# Altium PCB Signal Turn D 41mm.PcbDoc
Units mm, origin at the board's own origin, x right, y up, seen from the top; angles counter-clockwise.
Board outline 152.4 x 101.6 mm, 2 copper layers (Top Layer, Bottom Layer); 12 components, 11 nets, 26 pads, 2 vias.
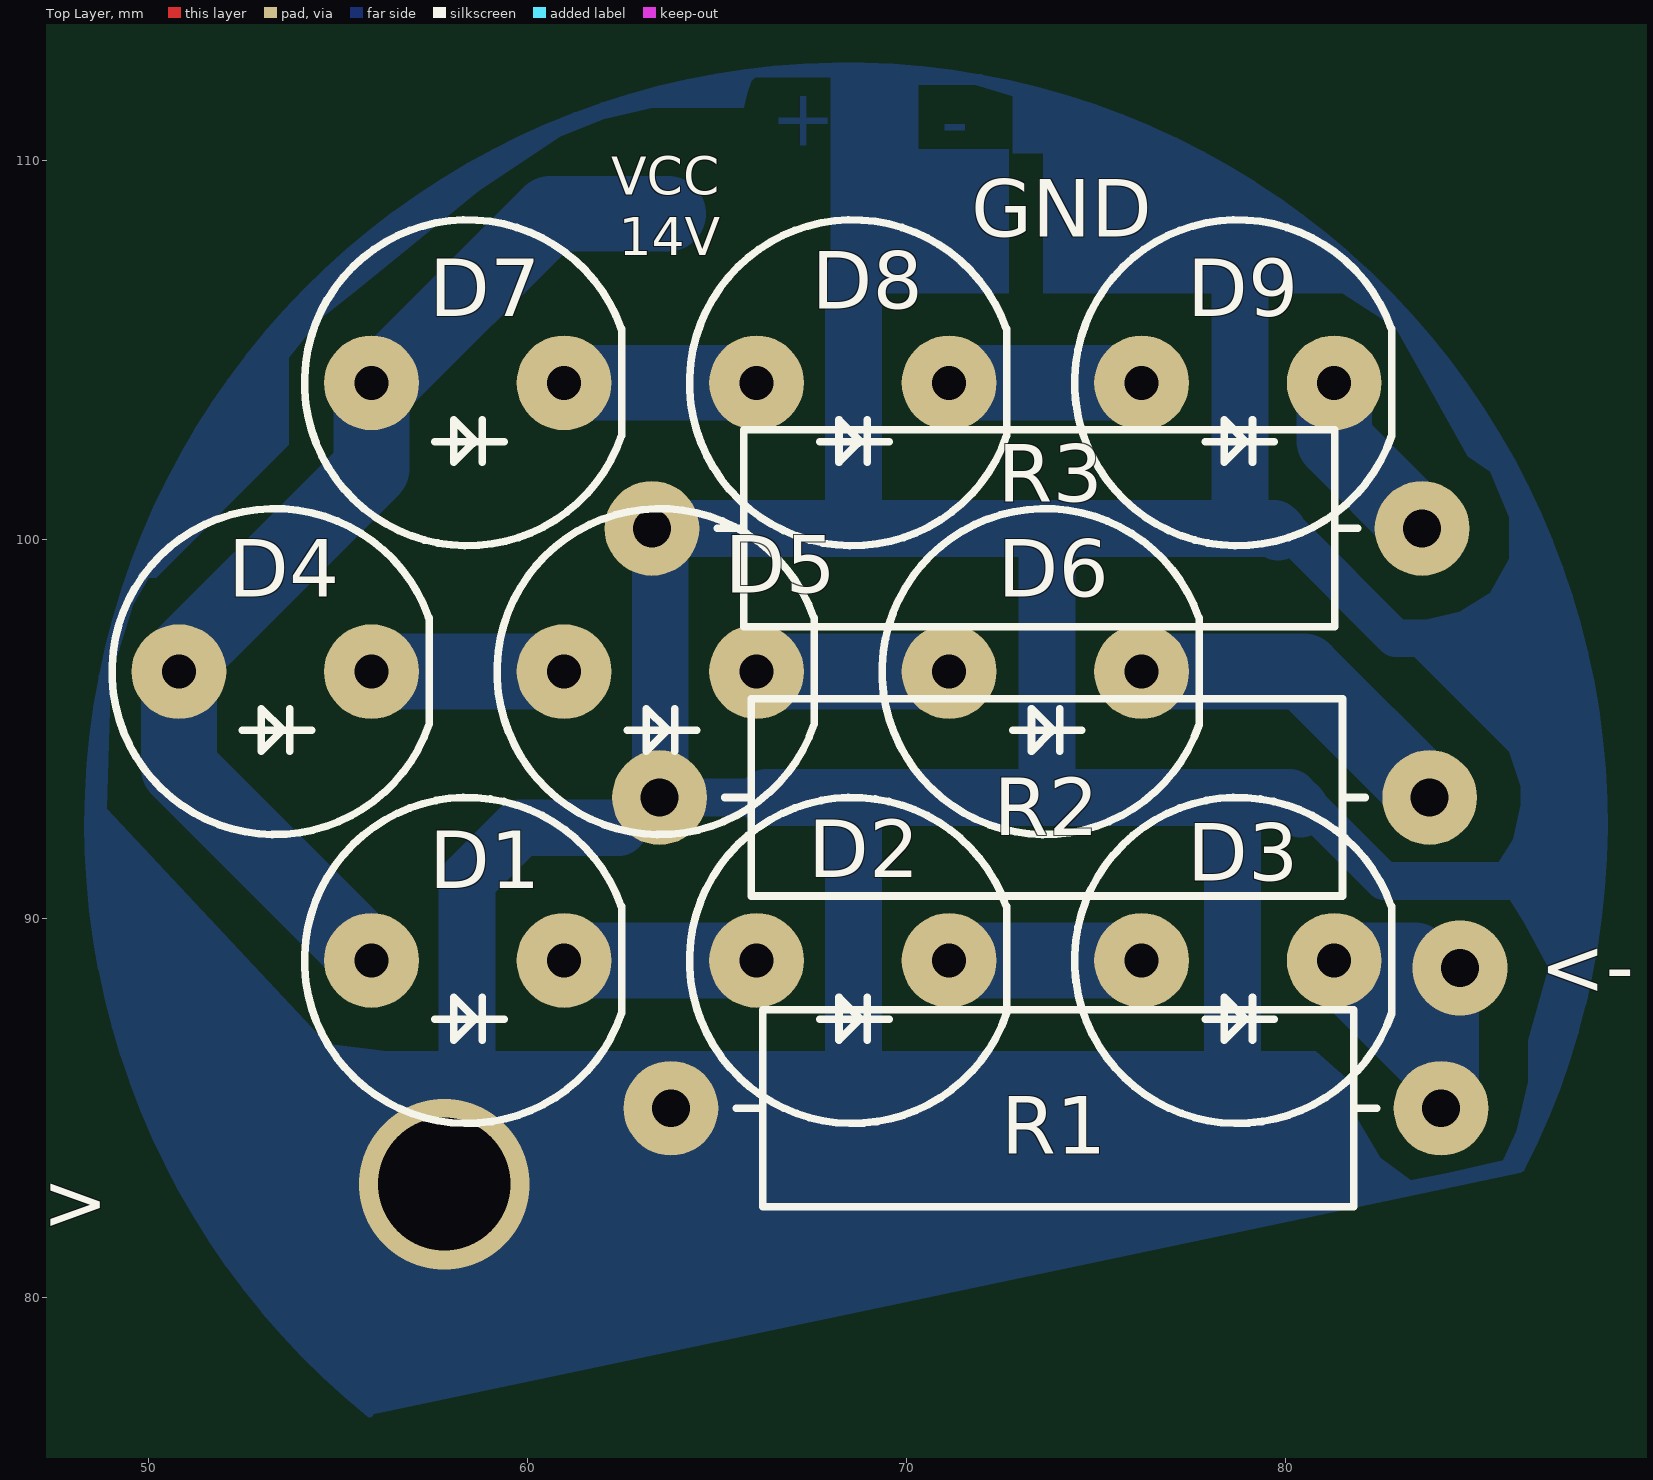
[diagram p0: Top Layer view]
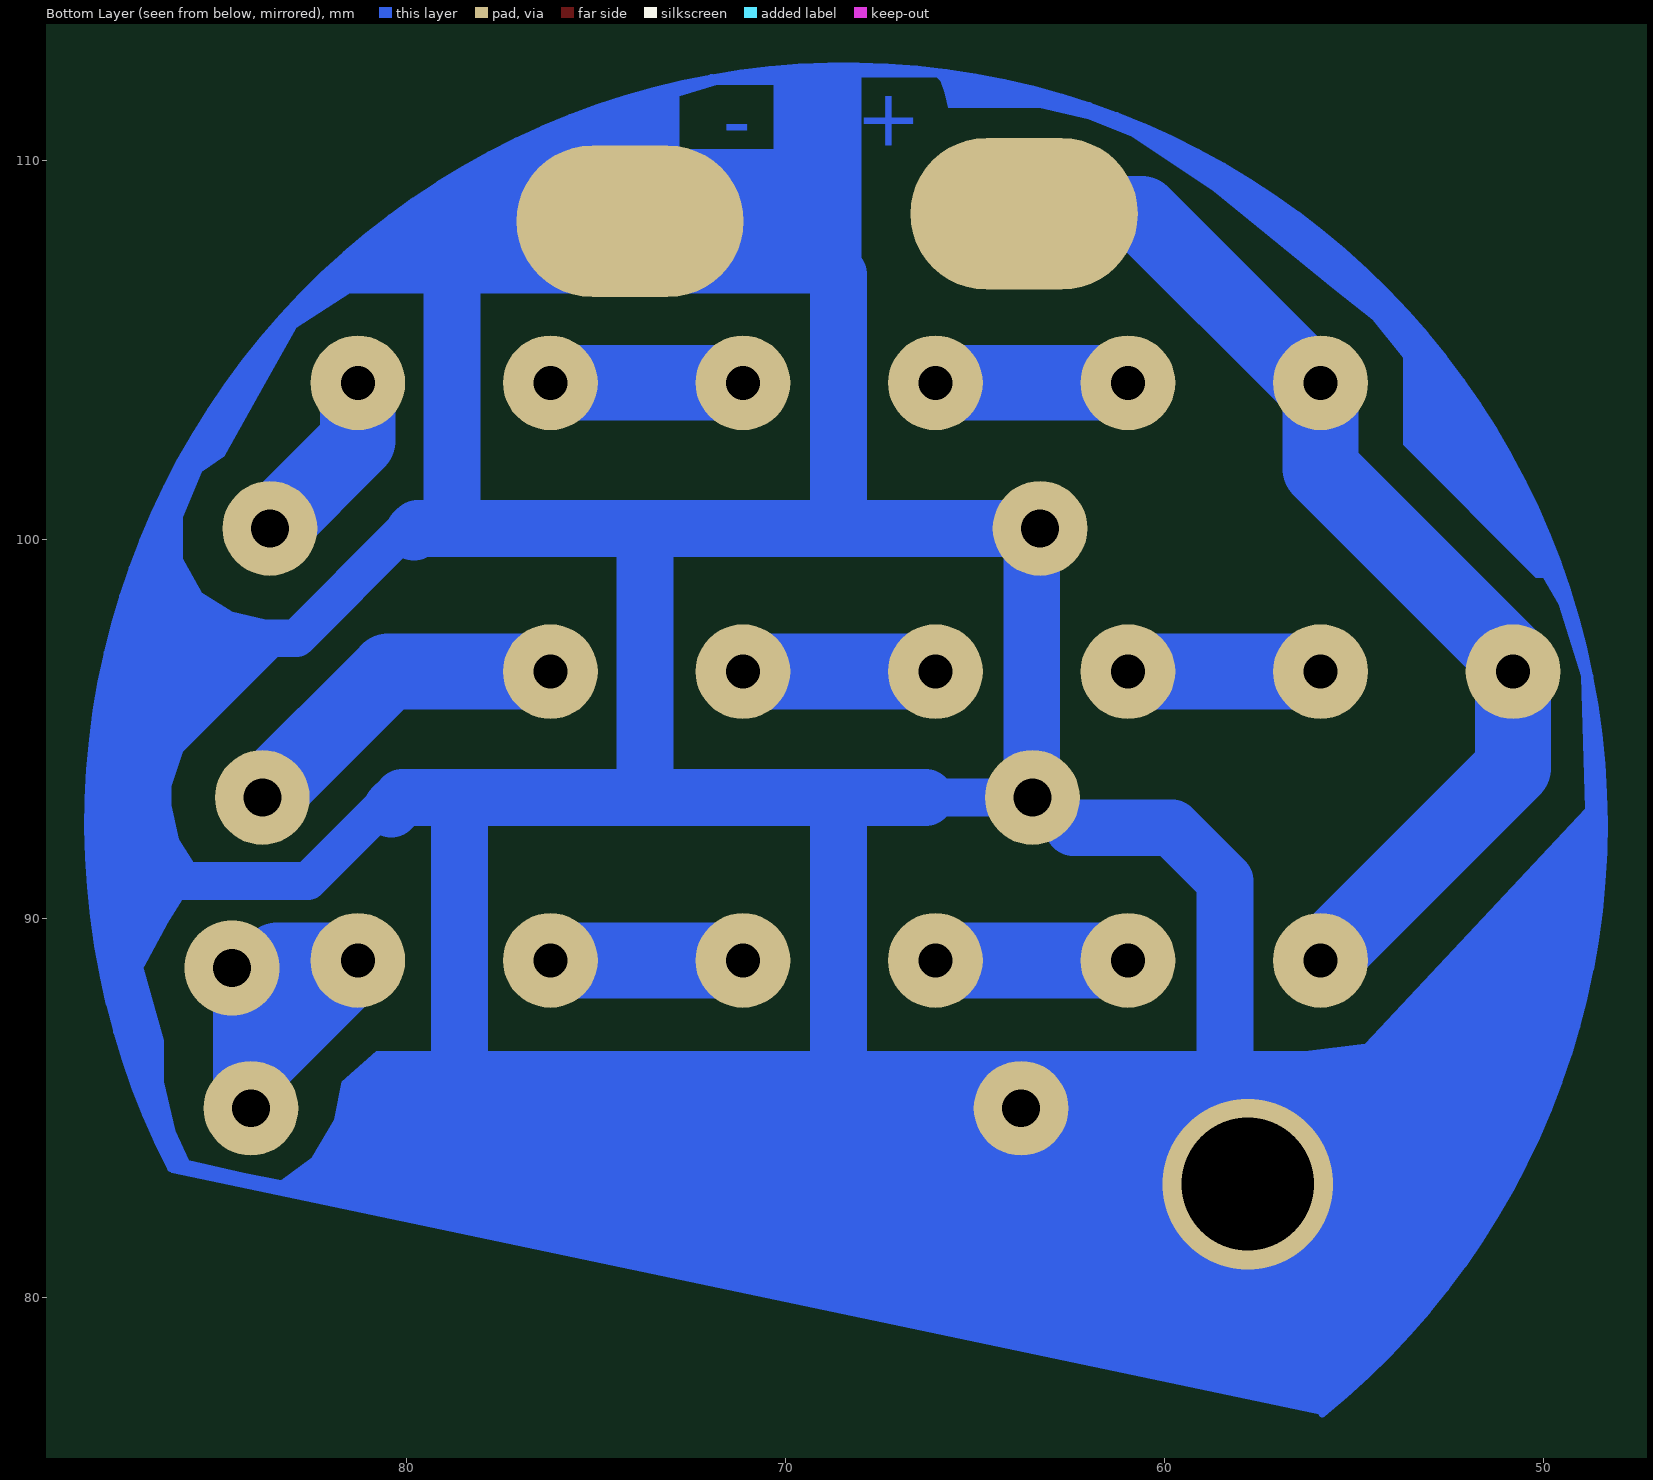
[diagram p1: Bottom Layer view, seen from below]
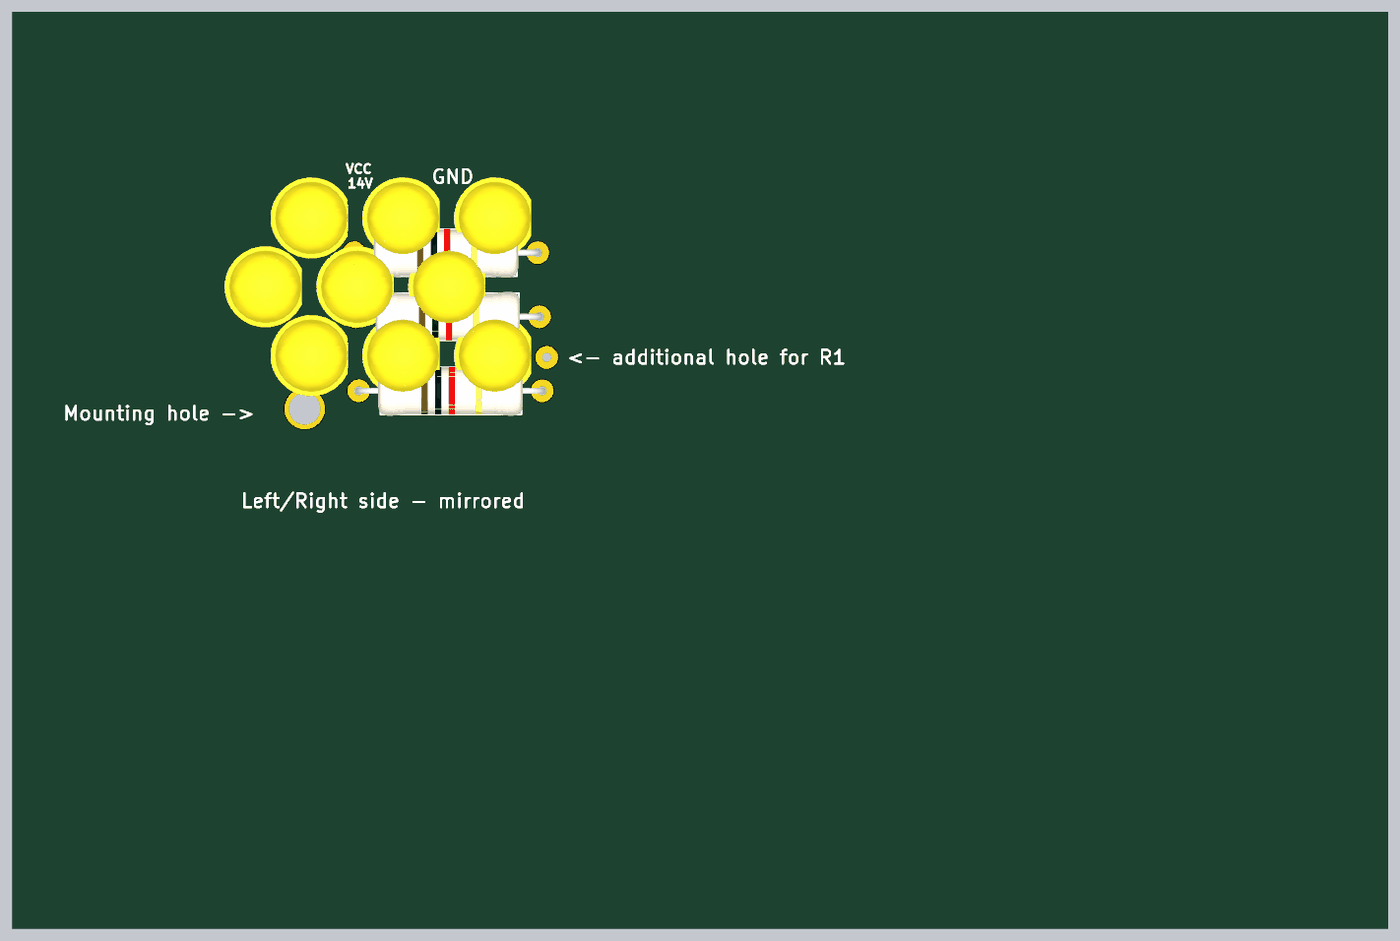
[diagram p2: 3D render of the assembled board from above, using the file's embedded part models]

## Layer stack, top to bottom
Top Solder: solder mask 0.0102, Solder Resist, Dk 3.5
Top Layer: signal copper 0.0356
Dielectric 1: dielectric 0.32, FR-4, Dk 4.8
Bottom Layer: signal copper 0.0356
Bottom Solder: solder mask 0.0102, Solder Resist, Dk 3.5

## Board outline
25.4,25.4 177.8,25.4 177.8,127 25.4,127

## Design rules (kind name [scope] priority, off if disabled: settings)
Clearance [All] p1: gap=0.254
ComponentClearance [All] p1: gap=0 collisioncheckmode=3 verticalgap=0 showdistances=FALSE
HoleSize [All] p1: absolutevalues=TRUE maxlimit=3 minlimit=0.025 maxpercent=80.000 minpercent=20.000
PlaneClearance [All] p1: clearance=1
PlaneConnect [All] p1: planeconnectstyle=Relief reliefexpansion=0.508 reliefentries=4 reliefconductorwidth=0.5 reliefairgap=1
PolygonConnect [All] p1: connectstyle=Relief reliefconductorwidth=0.254 reliefentries=4 polygonreliefangle="90 Angle" airgapwidth=1
RoutingVias [All] p1: holewidth=0.711 width=1.27 viastyle="Through Hole" minholewidth=0.711 minwidth=1.27 maxholewidth=0.711 maxwidth=1.27
SolderMaskExpansion [All] p1: expansion=0.102
Width [All] p1: maxlimit=3 minlimit=0.1 preferedwidth=2
25 further rules are at their usual default settings.

## Components (designator, comment, footprint, x,y, rotation, side; value= is the part's Value field where it differs from the comment)
D1 "Yellow" "LED Round 8mm Yellow" 55.88,88.9 r0 top
D2 "Yellow" "LED Round 8mm Yellow" 66.04,88.9 r0 top
D3 "Yellow" "LED Round 8mm Yellow" 76.2,88.9 r0 top
D4 "Yellow" "LED Round 8mm Yellow" 50.8,96.52 r0 top
D5 "Yellow" "LED Round 8mm Yellow" 60.96,96.52 r0 top
D6 "Yellow" "LED Round 8mm Yellow" 71.12,96.52 r0 top
D7 "Yellow" "LED Round 8mm Yellow" 55.88,104.14 r0 top
D8 "Yellow" "LED Round 8mm Yellow" 66.04,104.14 r0 top
D9 "Yellow" "LED Round 8mm Yellow" 76.2,104.14 r0 top
R1 "Om" "Res p20.32 (9p) 2w" 84.1,85 r180 top
R2 "Om" "Res p20.32 (9p) 2w" 83.8,93.2 r180 top
R3 "Om" "Res p20.32 (9p) 2w" 83.6,100.3 r180 top

## Footprints (in the part's own frame and the unit in brackets; to place one, negate y for a bottom-side part, rotate by r counter-clockwise, add the part's x,y. Pads: shape width x height; smd on the part's side, far side on the other; paste and mask are expansions set on the pad)
"LED Round 8mm Yellow" [mm]
  round 2.5 hole 0.9: A(0,0) K(5.08,0)
  silkscreen extent -1.77,-4.3 6.6,4.3, body extent -1.85,-4.5 6.68,4.5, height 13
"Res p20.32 (9p) 2w" [mm] "L p20.32; horisontal"
  round 2.5 hole 1: 1(0,0) 2(20.32,0)
  silkscreen extent 1.7,-2.6 18.6,2.6, body extent -0.35,-2.75 20.67,2.75, height 5.5

## Part data
D1 D2 D3 D4 D5 D6 D7 D8 D9: library part "Led Round 8mm Yellow 0.5W", "2.8-3v 25mA, 4-5cd"
R1 R2 R3: library part "Res 2W", "5W Cement"

## Free pads (board coordinates)
  oval 6x4 smd far side: 0(63.7,108.6) 1(74.1,108.4)

## Via types
v1: diameter 2.5, hole 1, Top Layer to Bottom Layer, 1 vias
v2: diameter 4.5, hole 3.5, Top Layer to Bottom Layer, 1 vias

## Nets (pads, with @x,y where several pads share a name; then routed paths per layer and width w, separated by ;. In a path a pad name is that pad's centre, name@x,y a point inside that pad or via, vN(x,y) a via of type N, cw(c..) or ccw(c..) an arc to the next point about the centre after c; other vN are vias at no path point)
GND: pad.1 R1.2 R2.2 R3.2 | length 189
  Bottom Layer w0.2: 55.833,76.941 cw(c68.4,92.5) 86.218,83.416
  Bottom Layer w1: 62.4,92.4 R2.2@63.5,93.5 ; R3.2 R3.2@63.5,100.08 ; R2.2 66.3,93.2 ; 79.8,100.2 80.1,100.2 82.9,97.4 84.6,97.4 ; 80.4,92.9 80.7,92.9 82.6,91 86.9,91
  Bottom Layer w1.5: 58.4,85.9 58.4,91 59.8,92.4 62.4,92.4 ; R3.2 79.7,100.3 79.8,100.2 ; R2.2@63.5,93.5 R3.2@63.5,100.08 ; 66.3,93.2 80.1,93.2 80.4,92.9 ; 68.6,85.9 68.6,93 ; 68.6,100.3 68.6,107 ; 73.7,93.4 73.7,100.1 ; 78.6,86.3 78.6,93 ; 78.8,100.6 78.8,107.3
  other v2: 57.8,83
NetD1_K: D1.K D2.A | length 5.1
  Bottom Layer w2: D1.K D2.A
NetD2_K: D2.K D3.A | length 5.1
  Bottom Layer w2: D2.K D3.A
NetD3_K: D3.K R1.1 | length 11.4
  Bottom Layer w2: D3.K 83.4,88.9 84.1,88.2 R1.1 84.1,86.08 D3.K
  other v1: 84.6,88.7
NetD4_K: D4.K D5.A | length 5.1
  Bottom Layer w2: D4.K D5.A
NetD5_K: D5.K D6.A | length 5.1
  Bottom Layer w2: D5.K D6.A
NetD6_K: D6.K R2.1 | length 9
  Bottom Layer w2: D6.K 80.48,96.52 R2.1
NetD7_K: D7.K D8.A | length 5.1
  Bottom Layer w2: D7.K D8.A
NetD8_K: D8.K D9.A | length 5.1
  Bottom Layer w2: D8.K D9.A
NetD9_K: D9.K R3.1 | length 4.8
  Bottom Layer w2: D9.K 81.28,102.62 R3.1
VCC: D1.A D4.A D7.A pad.0 | length 28.9
  Bottom Layer w2: D1.A 50.8,93.98 D4.A 50.8,96.8 55.88,101.88 D7.A ; D7.A@56.14,104.14 60.6,108.6 pad.0

## Other copper
Bottom Layer:
  region net GND: 87.8,87.5 88.3,90 88.4,92.9 88.1,95.9 87.6,98 86.9,100.1 86.1,101.8 85.4,101.8 85.9,100.6 85.9,99.5 85.4,98.6 84.6,98.1 83.3,97.8 83.3,97 85.9,94.4 86.2,93.5 86.2,93 86,92.1 85.5,91.3 85.8,90.7 86.3,89.9 87.1,88.4
  region net GND: 49.5,99 50.2,99 53.7,102.5 53.7,104.8 54.5,105.8 55.5,106.6 58.7,109.2 60.844,110.63 62,111.1 63.3,111.4 65.7,111.4 65.8,111.8 65.9,112.1 66,112.2 68,112.2 68,106.5 72.7,106.5 72.7,110.3 70.3,110.3 70.3,112 71.8,112 72.8,111.7 72.8,110.2 73.6,110.2 73.6,106.5 81.5,106.5 82.9,105.6 83.8,104 84.8,102.2 85.4,101.8 86.1,101.8 84.7,104.1 82.9,106.3 80.3,108.6 77.5,110.3 74.7,111.5 71.3,112.3 69,112.5 66.8,112.4 64.6,112.1 62.2,111.5 60.3,110.8 58.4,109.8 55.3,107.7 52.7,104.9 50.8,102.1
  region net GND: 55.833,76.941 54.1,78.6 52.5,80.4 51.2,82.3 50.2,84.2 49.2,86.8 48.6,89.9 48.4,92.6 48.6,95 48.9,97 49.5,99 50,99 49.6,98.3 49,96.4 48.9,92.9 54.7,86.7 56.3,86.5 80.8,86.5 81.7,85.7 81.9,84.7 82.5,83.7 83.3,83.1 84.3,83.3 85.738,83.632 86.1,84.4 86.4,85.7 86.4,86.8 86.6,87.5 87,88.9 87.8,87.5 87.4,86.3 86.25,83.4
  region net GND: 86.3,83.5 55.7,77 55.8,76.9 86.2,83.3
  text "+" at 66.4,110.4 h1.52
  text "-" at 70.9,110.3 h1.52

## Silkscreen, mask and mechanical layers (free items; w line width, h text height)
Top Overlay:
  text "VCC" at 62.2,109.1 h1
  text "GND" at 71.7,108 h1.52
  text "14V" at 62.4,107.5 h1
  text "<- additional hole for R1" at 86.7,88 h1.52
  text "Mounting hole ->" at 30.9,81.8 h1.52
  text "Left/Right side - mirrored" at 50.6,72.1 h1.52